# Altium PCB WE_PCB.PcbDoc
Units mm, origin at the board's own origin, x right, y up, seen from the top; angles counter-clockwise.
Board outline 85 x 66 mm, 2 copper layers (Top Layer, Bottom Layer); 11 components, 12 nets, 35 pads, 2 vias.
Unrouted connection lines stored in the file: 1.
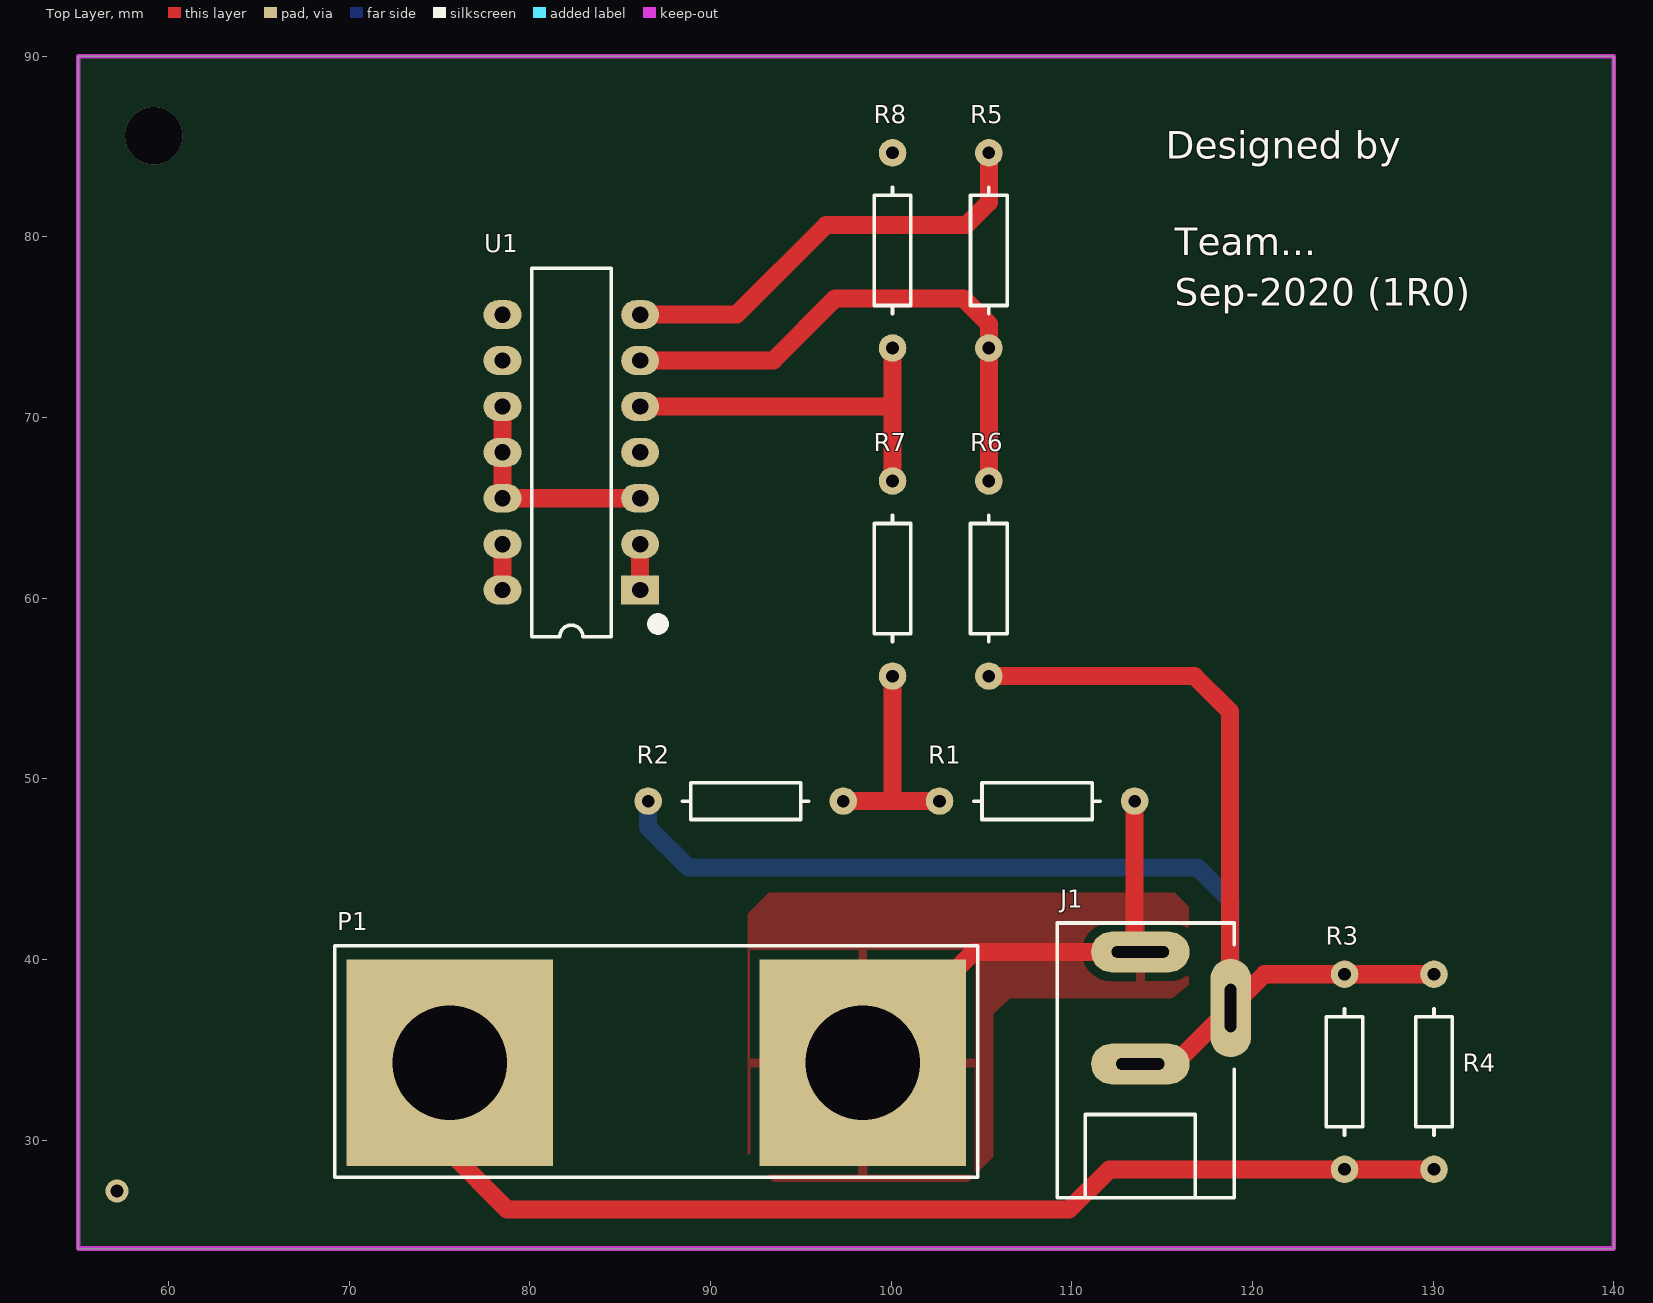
[diagram p0: Top Layer view]
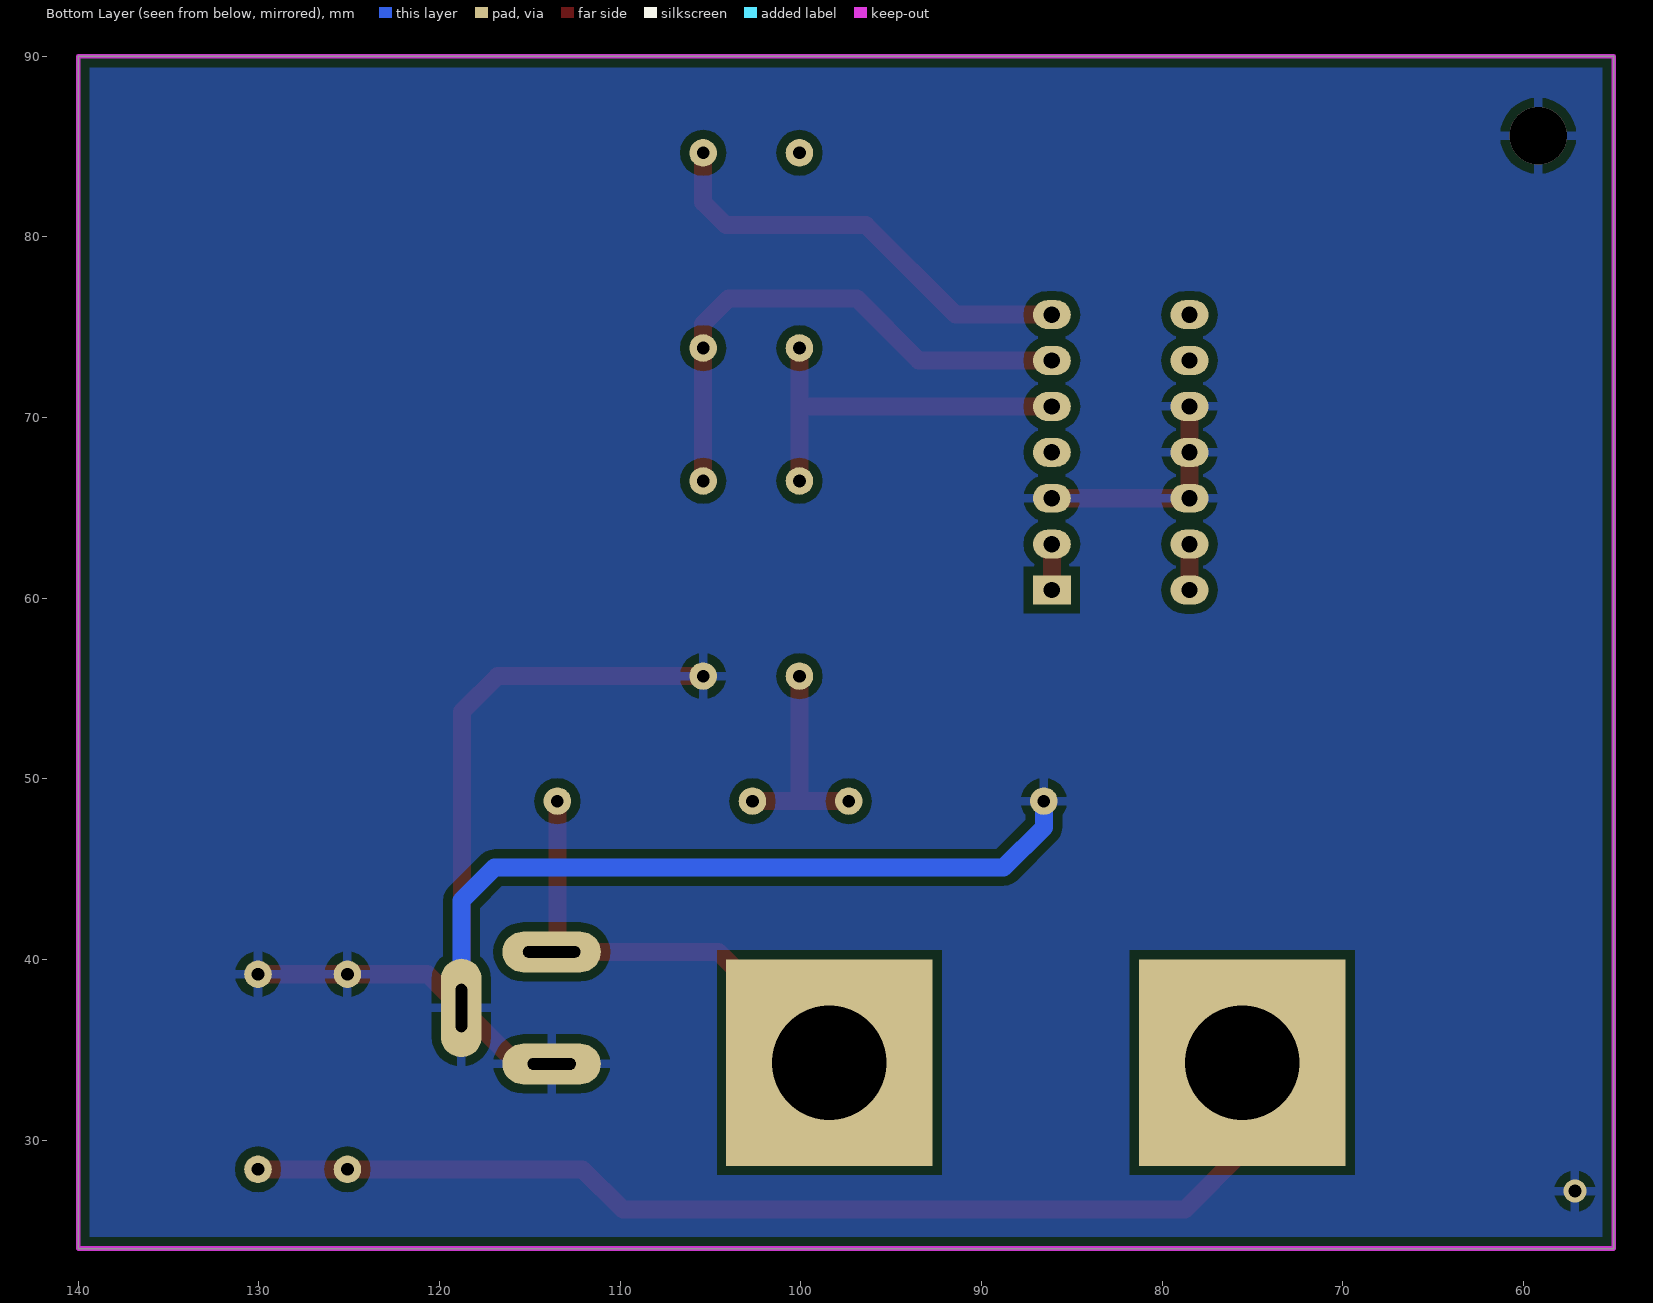
[diagram p1: Bottom Layer view, seen from below]
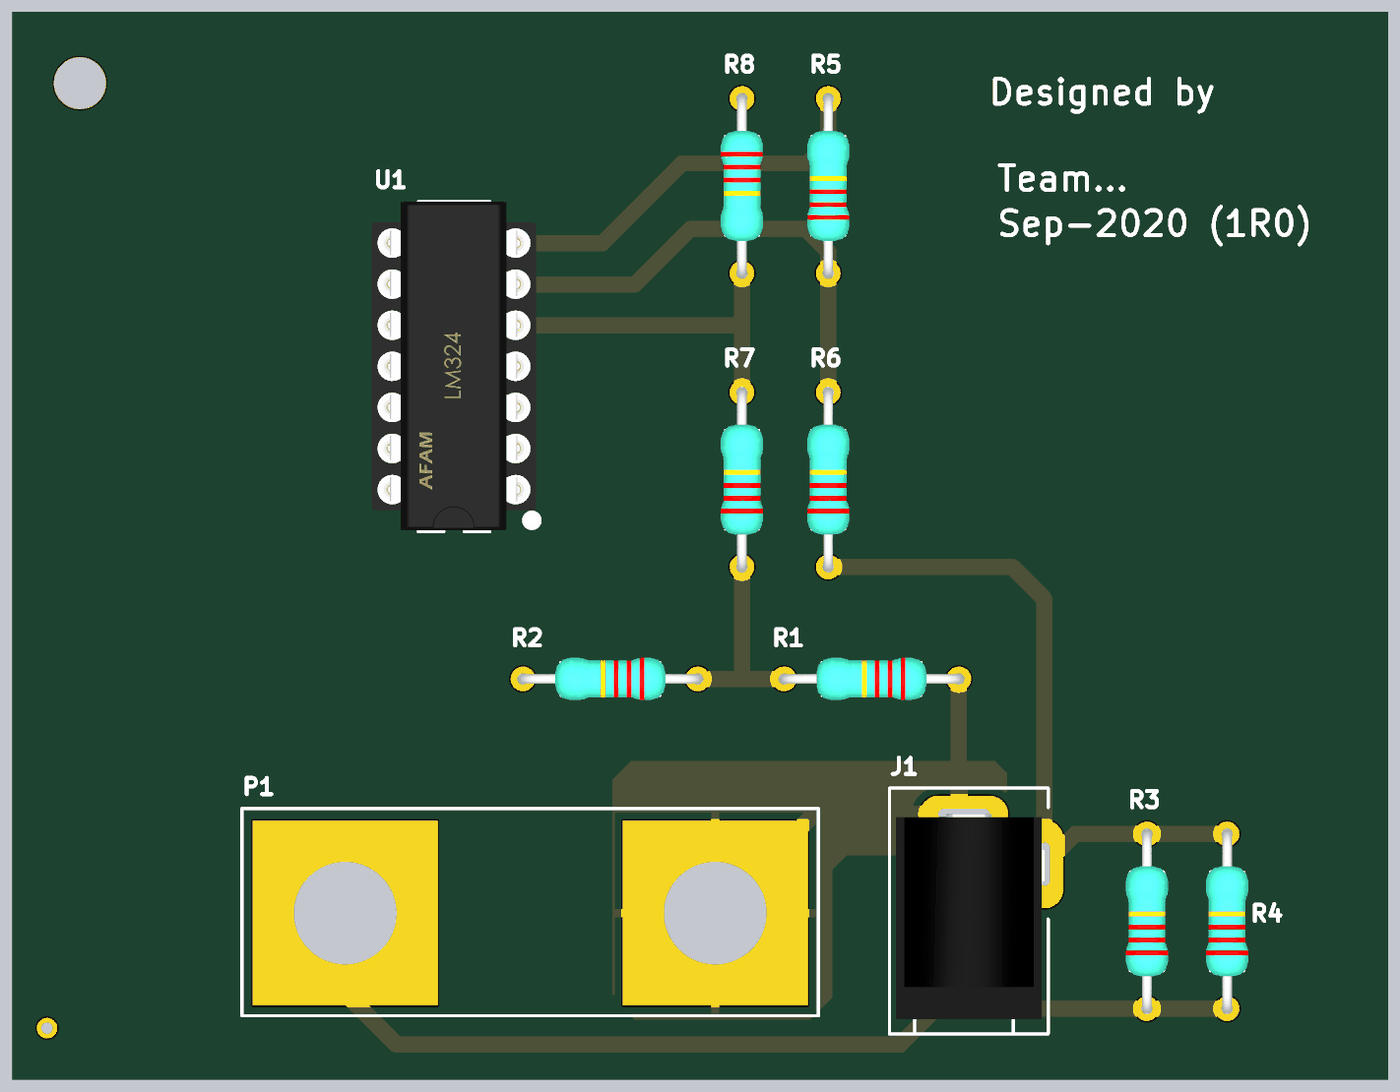
[diagram p2: 3D render of the assembled board from above, using the file's embedded part models]

## Layer stack, top to bottom
Top Solder: solder mask 0.0102, Solder Resist, Dk 3.5
Top Layer: signal copper 0.0356
Dielectric 1: dielectric 0.32, FR-4, Dk 4.8
Bottom Layer: signal copper 0.0356
Bottom Solder: solder mask 0.0102, Solder Resist, Dk 3.5

## Board outline
55,24 140,24 140,90 55,90

## Design rules (kind name [scope] priority, off if disabled: settings)
Clearance [All] p1: gap=0.5 ignorepadtopadclearanceinfootprint=FALSE
Height [All] p1: minheight=0 maxheight=100 prefheight=12.7
HoleSize [All] p1: absolutevalues=TRUE maxlimit=10 minlimit=0.5 maxpercent=80.000 minpercent=20.000
PolygonConnect [All] p1: connectstyle=Relief reliefconductorwidth=0.5 reliefentries=4 polygonreliefangle="90 Angle" airgapwidth=0.5
RoutingVias [All] p1: holewidth=0.711 width=1.27 viastyle="Through Hole" minholewidth=0.711 minwidth=1.27 maxholewidth=0.711 maxwidth=1.27
SilkToSilkClearance [All] p1: silktosilkclearance=0.1
SilkToSolderMaskClearance [IsPad] p1: minsilkscreentomaskgap=0.1 clearancetoexposedcopper=TRUE
SolderMaskExpansion [All] p1: expansion=0.102 istentingtop=FALSE
Width [All] p1: maxlimit=10 minlimit=0.5 preferedwidth=1
26 further rules are at their usual default settings.

## Components (designator, comment, footprint, x,y, rotation, side; value= is the part's Value field where it differs from the comment)
J1 "DC barrel jack" AC-Socket 113.792,34.417 r90 top value=socket
P1 "Dual Banana Plugs" "Dual Banana Plug" 86.995,34.29 r180 top
R1 "100k" AXIAL-0.4 108.077,48.768 r180 top
R2 "10k" AXIAL-0.4 91.948,48.768 r180 top
R3 "1R0" AXIAL-0.4 125.095,33.782 r90 top
R4 "1R0" AXIAL-0.4 130.048,33.782 r90 top
R5 "100k" AXIAL-0.4 105.41,79.248 r90 top
R6 "100k" AXIAL-0.4 105.41,61.087 r90 top
R7 "91k" AXIAL-0.4 100.076,61.087 r90 top
R8 "100k" AXIAL-0.4 100.076,79.248 r270 top
U1 "LM324" DIP-14 82.296,68.072 r180 top

## Footprints (in the part's own frame and the unit in brackets; to place one, negate y for a bottom-side part, rotate by r counter-clockwise, add the part's x,y. Pads: shape width x height; smd on the part's side, far side on the other; paste and mask are expansions set on the pad)
AC-Socket [mm]
  oval 2.25x5.45 hole 0.635 slot 3.175 at 90 deg: 1(6,0)
  oval 5.45x2.25 hole 0.635 slot 2.667 at 0 deg: 2(2.9,-5)
  oval 2.25x5.45 hole 0.635 slot 2.667 at 90 deg: 3(-0.2,0)
  silkscreen extent -7.6,-5.2 7.6,4.6, body extent -6.7,-5 6,4.2, height 10.5
AXIAL-0.4 [mm]
  round 1.524 hole 0.7: 1(-5.4,0) 2(5.4,0)
  silkscreen extent -3.5,-1.02 3.5,1.02, body extent -5.7,-1.3 5.7,1.3, height 2.7
DIP-14 [mm] "DIP; 14 Leads; Row Spacing 7.62 mm; Pitch 2.54 mm"
  rect 2.1x1.6 hole 0.9: 1(-3.81,7.62)
  oval 2.1x1.6 hole 0.9: 2(-3.81,5.08) 3(-3.81,2.54) 4(-3.81,0) 5(-3.81,-2.54) 6(-3.81,-5.08) 7(-3.81,-7.62) 8(3.81,-7.62) 9(3.81,-5.08) 10(3.81,-2.54) 11(3.81,0) 12(3.81,2.54) 13(3.81,5.08) 14(3.81,7.62)
  silkscreen extent -5.1,-10.2 2.2,10.2, body extent -5.07,-10.2 5.09,10.12, height 9.47
"Dual Banana Plug" [mm] "Connector; 2 Position"
  rect 11.43x11.43 hole 6.35: 1(-11.43,0) 2(11.43,0)
  silkscreen extent -17.8,-6.48 17.8,6.35, body extent -17.38,-5.99 17.43,5.99, height 5.5

## Part data
J1: library part AC_Input, "DC barrel jack connection to AC source"
P1: library part AC_Output, "Dual banana plugs connection to the AC load", LatestRevisionDate=17-Jul-2002, LatestRevisionNote="Re-released for DXP Platform.", Publisher="Altium Limited"
R1 R2 R3 R4 R5 R6 R7 R8: library part Res_TH_0AX4, "Through hole resistor", ComponentLink1Description=http://www.royalohm.com/pdf/product2017/PrecisionMetalMF.pdf, LatestRevisionDate=17-Jul-2002, LatestRevisionNote="Re-released for DXP Platform.", PackageReference=AXIAL-0.4, Published=8-Jun-2000, Publisher="Altium Limited"
U1: library part LM324N_TH_DIP16, "IC OPAMP GP 14DIP", Current - Supply=1mA, Manufacturer="ON Semiconductor", Manufacturer Part Number=LM324N, Operating Temperature="0°C ~ 70°C", Package / Case="14-DIP (0.300\", 7.62mm)", Supplier Device Package=14-DIP, Supplier Part Number 1=LM324NFS-ND, Voltage - Supply, Single/Dual (±)="3 V ~ 32 V, ±1.5 V ~ 16 V", Amplifier Type="General Purpose", Base Part Number=LM324, Category="Integrated Circuits (ICs)", ComponentLink1Description=https://www.fairchildsemi.com/datasheets/LM/LM2902.pdf, ComponentLink1URL=https://www.fairchildsemi.com/datasheets/LM/LM2902.pdf, Mounting Type="Through Hole", Output Type=-, Packaging=Tube, Part Status=Active, Pricing 1="1=0.9, 10=0.775, 100=0.5789, 500=0.45482, 1000=0.35145 (NZD)", RoHS="RoHS Compliant", Slew Rate=-, Stock 1=2900, Supplier 1=Digi-Key

## Via types
v1: diameter 1.27, hole 0.711, Top Layer to Bottom Layer, 1 vias
v2: diameter 3.2, hole 3.2, Top Layer to Bottom Layer, 1 vias

## Nets (pads, with @x,y where several pads share a name; then routed paths per layer and width w, separated by ;. In a path a pad name is that pad's centre, name@x,y a point inside that pad or via, vN(x,y) a via of type N, cw(c..) or ccw(c..) an arc to the next point about the centre after c; other vN are vias at no path point)
2V1: R8.1
5V: U1.4
GND: J1.2 J1.3 R2.2 R3.2 R4.2 R6.1 U1.3 U1.10 U1.11 U1.12 | length 102.9
  Top Layer w1: U1.10 U1.11 U1.12 U1.3 ; R6.1 116.779,55.687 118.745,53.721 118.745,37.364 J1.2 ; J1.3 115.692,34.217 J1.2 ; R4.2 R3.2 120.657,39.182 J1.2
  Bottom Layer w1: R2.2 86.548,47.31 88.773,45.085 116.967,45.085 118.792,43.26 J1.2
  other v1: 57.15,27.178
  other v2: 59.182,85.598
NetR5_1: R5.1 R6.2 U1.6 | length 30
  Top Layer w1: U1.6 93.472,73.152 96.901,76.581 104.013,76.581 105.41,75.184 R5.1 R6.2
NetR5_2: R5.2 U1.7 | length 24.6
  Top Layer w1: U1.7 91.44,75.692 96.393,80.645 104.14,80.645 105.41,81.915 R5.2
NetR7_2: R7.2 R8.2 U1.5 | length 21.4
  Top Layer w1: U1.5 99.822,70.612 100.076,70.358 ; R7.2 100.076,70.358 ; R8.2 100.076,70.358
NetU1_1: U1.1 U1.2 | length 2.5
  Top Layer w1: U1.1 U1.2
NetU1_8: U1.8 U1.9
NetU1_13: U1.13 U1.14 | length 2.5
  Top Layer w1: U1.14 U1.13
Vac: J1.1 P1.1 R1.1 | length 26.4
  Top Layer w1: P1.1 104.552,40.417 J1.1 113.477,40.732 R1.1
Vis: P1.2 R3.1 R4.1 | length 61.7
  Top Layer w1: P1.2 75.565,29.337 78.74,26.162 109.855,26.162 112.075,28.382 R3.1 R4.1
Vvs: R1.2 R2.1 R7.1 | length 12.2
  Top Layer w1: R2.1 100.076,48.768 ; R7.1 100.076,48.768 ; R1.2 100.076,48.768

## Polygon pours and split planes (outlines as drawn)
Vac on Top Layer "VAC_L01_P001" (solid, pour order 1): 116.459,38.608 116.459,42.926 115.697,43.688 93.218,43.688 92.075,42.545 92.075,29.083 93.472,27.686 104.267,27.686 105.664,29.083 105.664,36.957 106.553,37.846 115.57,37.846
GND on Bottom Layer "GND_L02_P000" (solid, pour order 0): 55,90 140,90 140,24 55,24

## Keep-outs
Keep-Out Layer:
  the board outline again, w0.254

## Silkscreen, mask and mechanical layers (free items; w line width, h text height)
Top Overlay:
  text "Designed by" at 115.189,84.328 h1.52
  text "Team..." at 115.697,78.994 h1.52
  text "Sep-2020 (1R0)" at 115.697,76.2 h1.52